# Altium PCB waffling60-MX.PcbDoc (part 1 of 2)
Units mm, origin at the board's own origin, x right, y up, seen from the top; angles counter-clockwise.
Board outline 284.81 x 94.3 mm, 2 copper layers (Component Side, Bottom Layer), stack 1.571 mm thick; 157 components, 101 nets, 791 pads, 59 vias.
Unrouted connection lines stored in the file: 52.
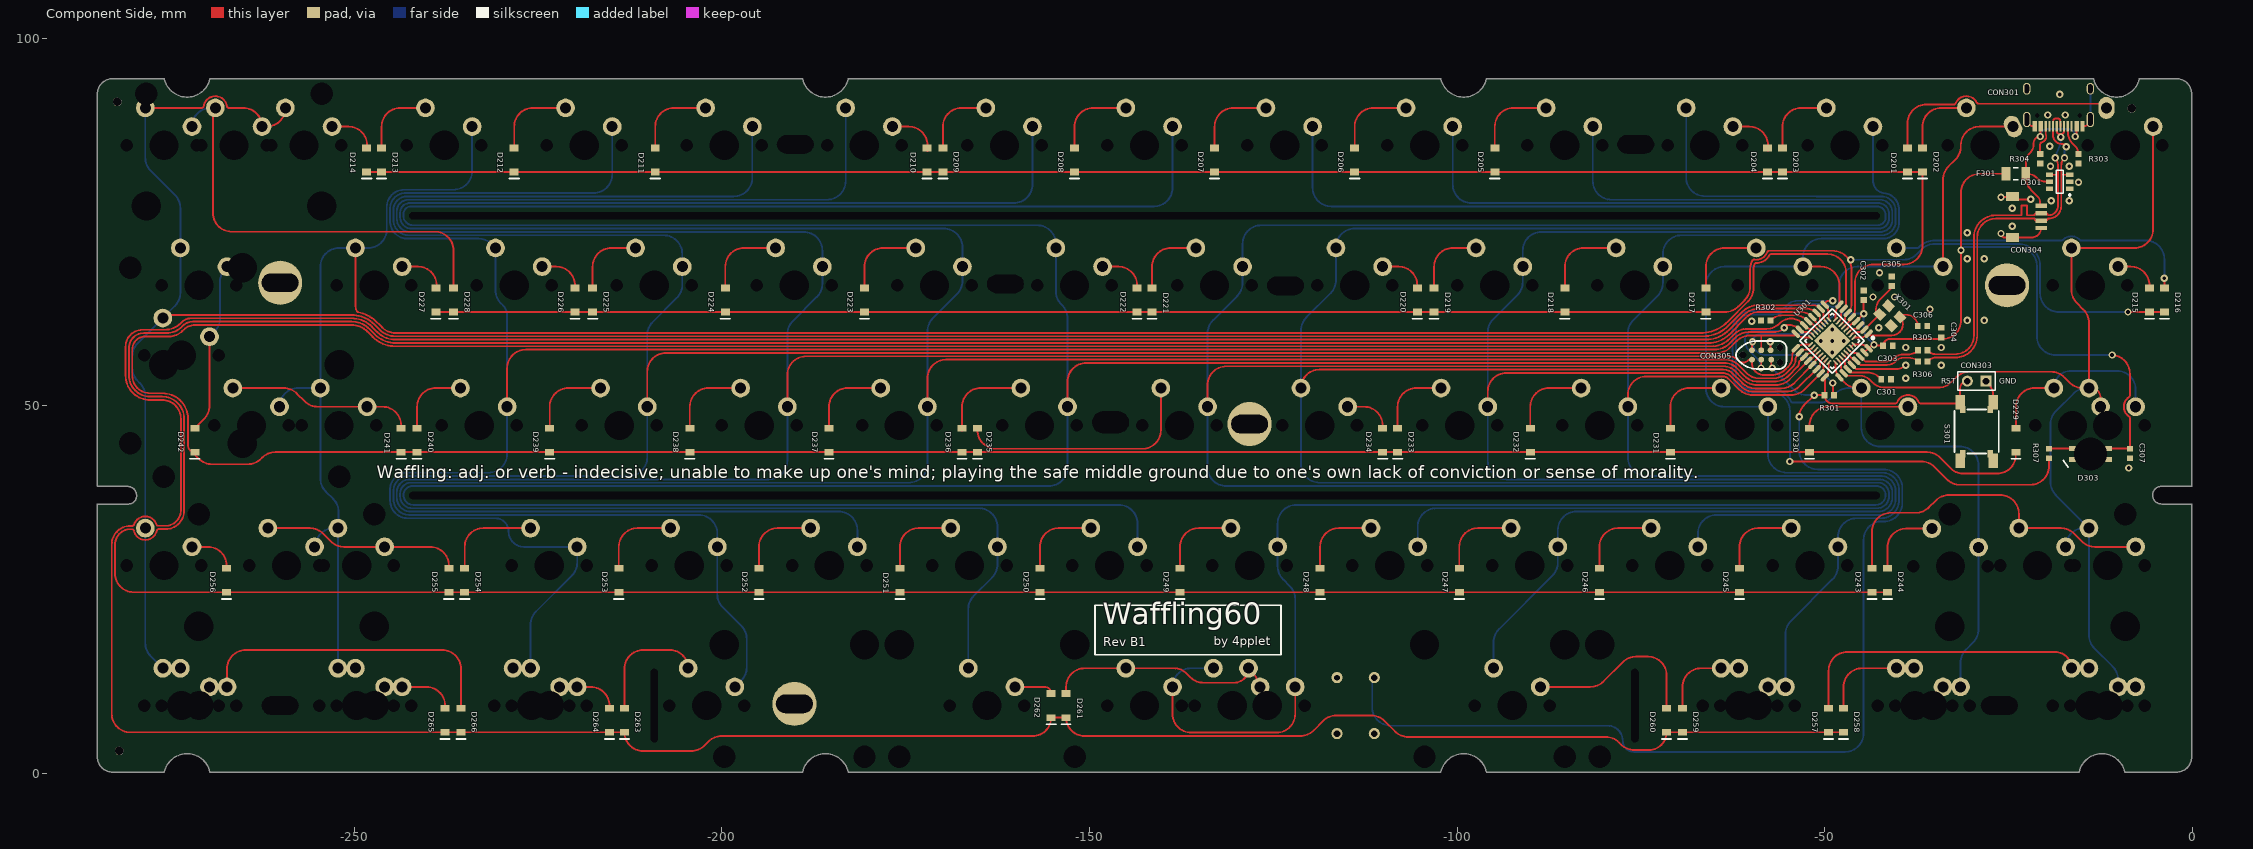
[diagram p0: Component Side view]
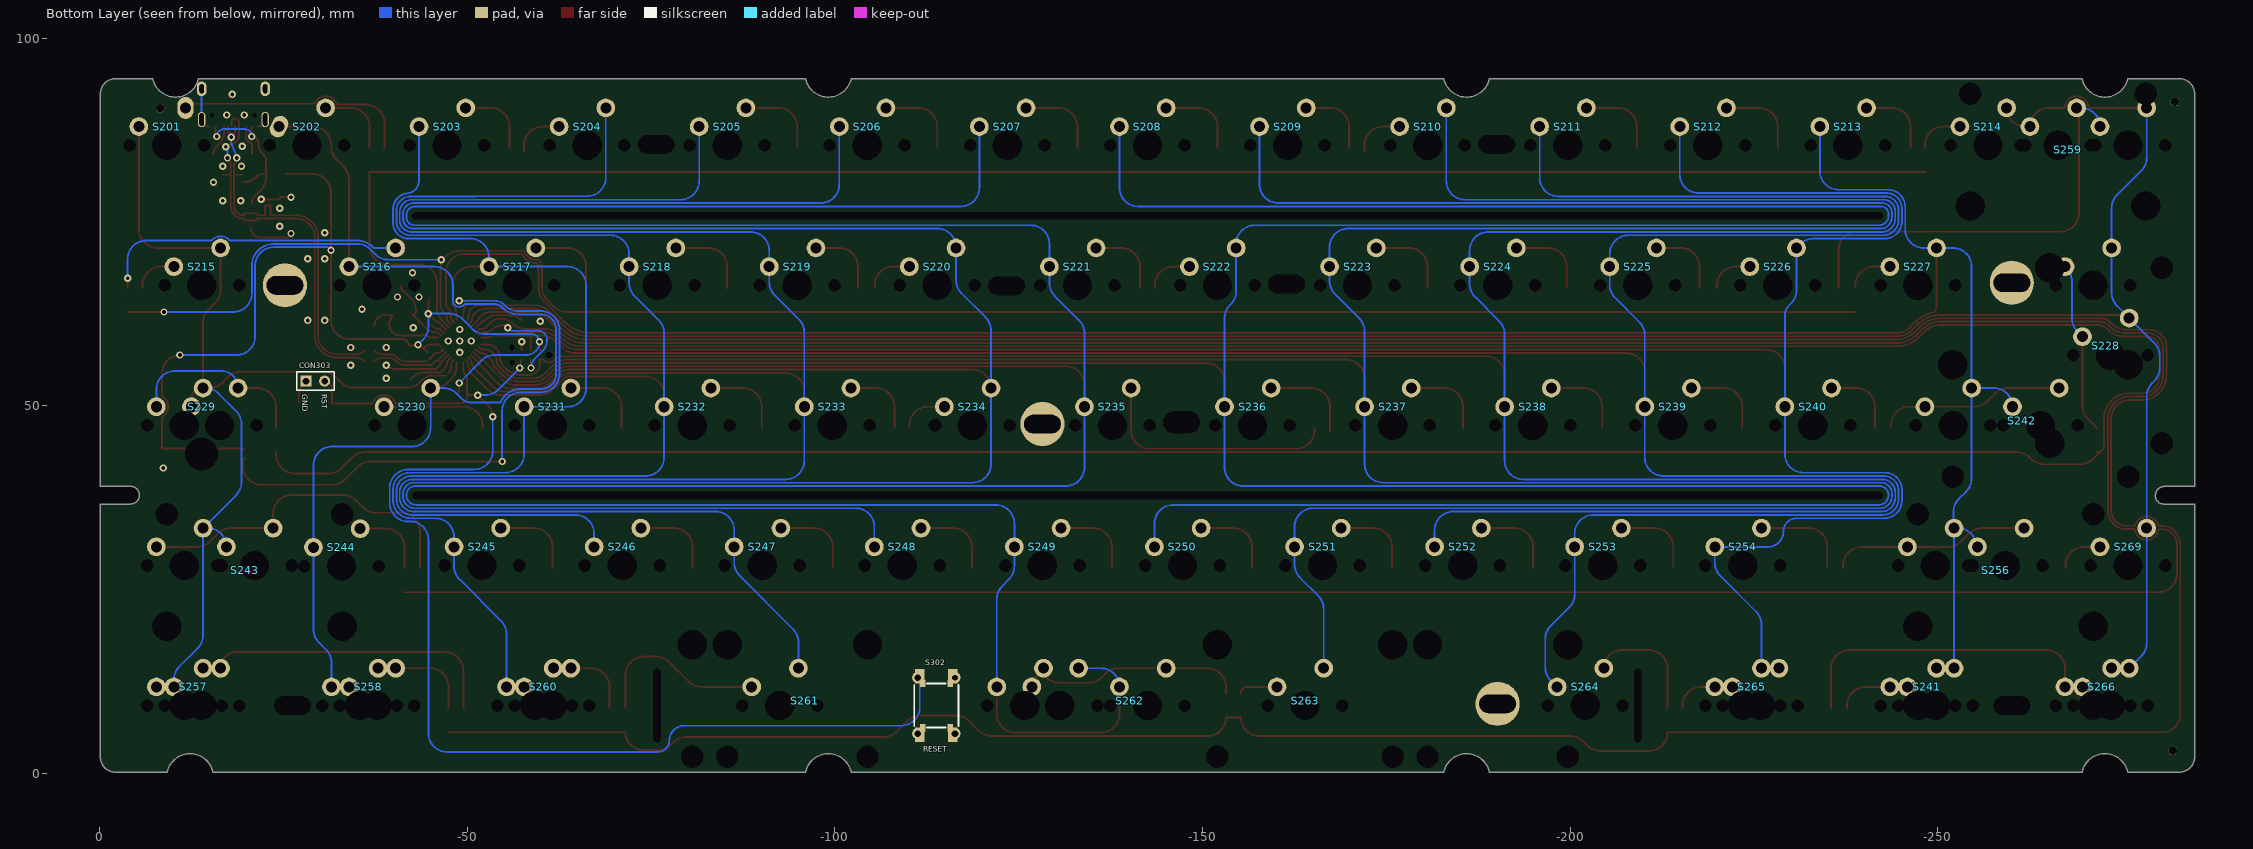
[diagram p1: Bottom Layer view, seen from below]
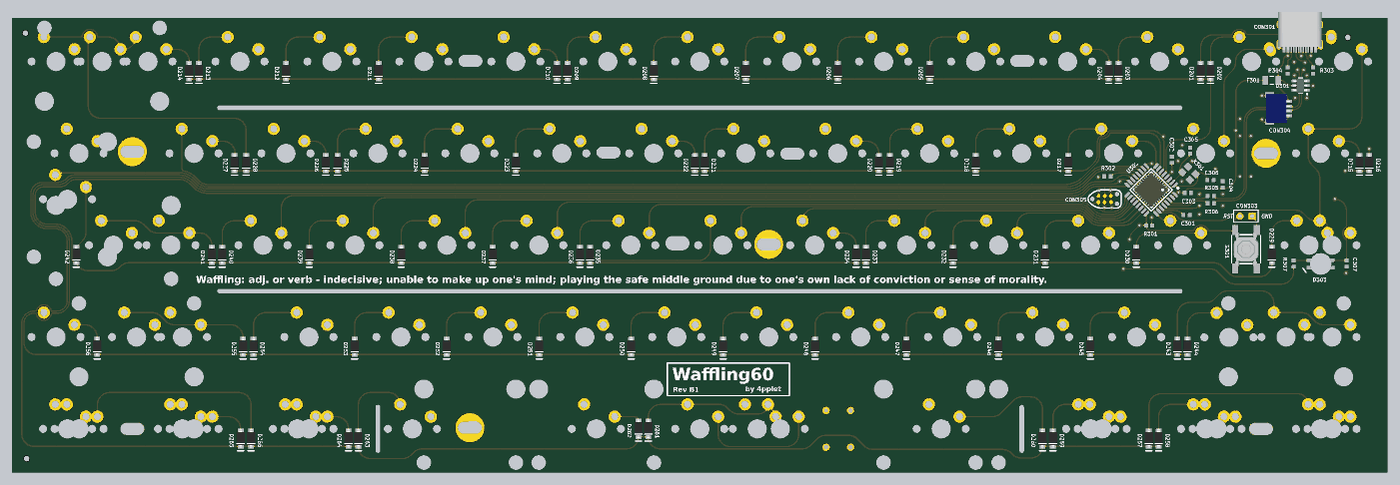
[diagram p3: 3D render of the assembled board from above, using the file's embedded part models]

## Layer stack, top to bottom
Top Solder: solder mask 0.0102, Solder Resist, Dk 3.5
Component Side: signal copper 0.0356
Dielectric 1: core 1.5, FR-4, Dk 4.2
Bottom Layer: signal copper 0.0356
Solder Side: solder mask 0.0102, Solder Resist, Dk 3.5

## Board outline
-282.85,0.165 ccw(c-282.85,0.215) -282.85,0.165 cw(c-282.85,2.215) -284.9,2.215 -284.9,36.545 cw(c-284.861,36.576) -284.861,36.626 -280.67,36.626 ccw(c-280.67,37.719) -279.577,37.719 -279.577,37.795 ccw(c-280.797,37.795) -280.797,39.015 -284.85,39.015 cw(c-284.85,39.065) -284.9,39.065 -284.9,92.415 cw(c-282.85,92.415) -282.85,94.465 cw(c-282.85,94.415) -282.85,94.465 -275.85,94.465 cw(c-275.85,94.415) -275.801,94.426 cw(c-272.7,95.149) -275.801,94.426 ccw(c-272.7,95.149) -269.599,94.426 cw(c-269.55,94.415) -269.55,94.465 -189.05,94.465 cw(c-189.05,94.415) -189.001,94.426 ccw(c-185.9,95.149) -182.799,94.426 cw(c-182.75,94.415) -182.75,94.465 -102.25,94.465 cw(c-102.25,94.415) -102.201,94.426 cw(c-99.1,95.149) -102.201,94.426 ccw(c-99.1,95.149) -95.999,94.426 cw(c-95.95,94.415) -95.95,94.465 -13.477,94.465 cw(c-13.477,94.415) -13.428,94.426 cw(c-10.327,95.149) -13.428,94.426 ccw(c-10.327,95.149) -7.226,94.426 cw(c-7.177,94.415) -7.164,94.464 cw(c-7.15,94.415) -7.15,94.465 -2.15,94.465 cw(c-2.15,92.415) -0.1,92.415 -0.1,39.065 cw(c-0.15,39.065) -0.15,39.015 -4.242,39.015 ccw(c-4.242,37.846) -5.411,37.846 ccw(c-4.191,37.846) -4.191,36.626 -0.15,36.626 cw(c-0.15,36.576) -0.1,36.576 -0.1,2.215 cw(c-2.15,2.215) -2.15,0.165 -9.15,0.165 ccw(c-9.15,0.215) -9.15,0.165 cw(c-9.15,0.215) -9.199,0.204 ccw(c-12.3,-0.52) -15.401,0.204 ccw(c-12.3,-0.52) -15.401,0.204 cw(c-15.45,0.215) -15.45,0.165 -95.95,0.165 cw(c-95.95,0.215) -95.999,0.204 ccw(c-99.1,-0.52) -102.201,0.204 ccw(c-99.1,-0.52) -102.201,0.204 cw(c-102.25,0.215) -102.25,0.165 -182.75,0.165 cw(c-182.75,0.215) -182.799,0.204 cw(c-185.9,-0.52) -182.799,0.204 ccw(c-185.9,-0.52) -189.001,0.204 cw(c-189.05,0.215) -189.05,0.165 -269.55,0.165 cw(c-269.55,0.215) -269.55,0.165 cw(c-269.55,0.215) -269.599,0.204 ccw(c-272.7,-0.52) -275.801,0.204 ccw(c-272.7,-0.52) -275.801,0.204 cw(c-275.85,0.215) -275.85,0.165

## Design rules (kind name [scope] priority, off if disabled: settings)
Clearance [All] p1: gap=0.2 ignorepadtopadclearanceinfootprint=FALSE except(0: Arc-Hole Track-Hole SMDPad-Hole THPad-Hole Via-Hole Fill-Hole Poly-Hole Region-Hole Text-Hole; 0.254: THPad-THPad THPad-Via THPad-Fill THPad-Poly THPad-Region THPad-Text Via-Via Via-Fill Via-Poly Via-Region Via-Text Fill-Fill Fill-Poly Fill-Region Fill-Text Poly-Poly Poly-Region Poly-Text Region-Region Region-Text Text-Text)
ComponentClearance [InComponent('No Component') And OnLayer('Component Side')] p1: gap=0.254 collisioncheckmode=3 verticalgap=0.254 showdistances=FALSE
DiffPairsRouting DiffPairsRouting_USB [InDifferentialPairClass('All Differential Pairs')] p1: maxlimit=0.254 minlimit=0.203 mostfreqgap=0.203 toplayer_minwidth=0.152 toplayer_maxwidth=0.381 toplayer_prefwidth=0.152 bottomlayer_minwidth=0.152 bottomlayer_maxwidth=0.381 bottomlayer_prefwidth=0.152 maxuncoupledlength=12.7
DiffPairsRouting [All] p2: maxlimit=0.254 minlimit=0.254 mostfreqgap=0.254 toplayer_minwidth=0.381 toplayer_maxwidth=0.381 toplayer_prefwidth=0.381 bottomlayer_minwidth=0.381 bottomlayer_maxwidth=0.381 bottomlayer_prefwidth=0.381 maxuncoupledlength=12.7
HoleSize [All] p1: absolutevalues=TRUE maxlimit=20 minlimit=0.025 maxpercent=80.000 minpercent=20.000
MatchedLengths MatchedLengths_USB_DiffPairs_1 [All] p1: tolerance=0.127 checknetsindiffpair=TRUE checkdiffpairvsdiffpair=FALSE checkxsignals=FALSE checkothers=FALSE
MatchedLengths MatchedLengths_USB_DiffPairs [All] p2: tolerance=0.127 checknetsindiffpair=TRUE checkdiffpairvsdiffpair=FALSE checkxsignals=FALSE checkothers=FALSE
PolygonConnect PolygonConnect_1 [All vs IsVia] p1: connectstyle=Direct reliefconductorwidth=0.254 reliefentries=4 polygonreliefangle="90 Angle" airgapwidth=0.254
PolygonConnect [All] p2: connectstyle=Relief reliefconductorwidth=0.254 reliefentries=4 polygonreliefangle="90 Angle" airgapwidth=0.254
RoutingVias [All] p1: holewidth=0.711 width=1.27 viastyle="Through Hole" minholewidth=0.711 minwidth=1.27 maxholewidth=0.711 maxwidth=1.27
SolderMaskExpansion [All] p1: expansion=0.102 istentingtop=FALSE
Width [All] p1: maxlimit=0.254 minlimit=0.203 preferedwidth=0.254
27 further rules are at their usual default settings.

## Classes and differential pairs
component class Designator: C201 C202 C203 C204 C205 C206 D201 D202 D203 D204 D205 D206 D207 D208 D209 D210 D211 D212 D213 D214 D215 D216 D217 D218 D219 D220 D221 D222 D223 D224 D225 D226 D227 D228 D229 D230 D231 D232 D233 D234 D235 D236 D237 D238 D239 D240 D241 D242 D243 D244 D245 D246 D247 D248 D249 D250 D251 D252 D253 D254 D255 D256 D257 D258 D259 D260 D261 D262 D263 D264 D265 D266 D268 S201 S202 S203 S204 S205 S206 S207 S208 S209 S210 S211 S212 S213 S214 S215 S216 S217 S218 S219 S220 S221 S222 S223 S224 S225 S226 S227 S228 S229 S230 S231 S232 S233 S234 S235 S236 S237 S238 S239 S240 S241 S242 S243 S244 S245 S246 S247 S248 S249 S250 S251 S252 S253 S254 S256 S257 S258 S259 S260 S261 S262 S263 S264 S265 S266 S269
differential pair D_PRE: +D_PRE_P -D_PRE_N
differential pair D: +D_P -D_N

## Components (designator, comment, footprint, x,y, rotation, side; value= is the part's Value field where it differs from the comment)
C301 "" C0603[1608] -41.656,53.594 r180 top value=1uF
C302 "" C0603[1608] -44.704,65.024 r270 top value=0.1uF
C303 "" C0603[1608] -41.402,58.166 r180 top value=0.1uF
C304 "" C0603[1608] -34.163,59.944 r270 top value=4,7uF
C305 "" C0603[1608] -40.894,66.914 r270 top value=36pF
C306 "" C0603[1608] -36.703,60.833 r180 top value=36pF
C307 "" C0603[1608] -8.5,43.5 r90 top value=0.1uF
CON301 "TYPE-C-31-M-12" TYPE-C-31-M-12 -18.2,88 r180 top locked
CON303 "Header 2" HDR1X2 -28.067,53.34 r180 top
CON304 "Header 5" "JST SM04B-SRSS-TB" -24.449,78.468 r270 top locked
CON305 "TC2030-IDC" TC2030-IDC-NL -58.627,56.896 r0 top locked
D201 "Diode" SOD-123 -38.735,83.415 r90 top
D202 "Diode" SOD-123 -36.703,83.415 r90 top
D203 "Diode" SOD-123 -55.753,83.415 r90 top
D204 "Diode" SOD-123 -57.785,83.415 r90 top
D205 "Diode" SOD-123 -94.869,83.415 r90 top
D206 "Diode" SOD-123 -113.919,83.415 r90 top
D207 "Diode" SOD-123 -132.969,83.415 r90 top
D208 "Diode" SOD-123 -152.019,83.415 r90 top
D209 "Diode" SOD-123 -169.926,83.415 r90 top
D210 "Diode" SOD-123 -172.085,83.415 r90 top
D211 "Diode" SOD-123 -209.042,83.415 r90 top
D212 "Diode" SOD-123 -228.219,83.415 r90 top
D213 "Diode" SOD-123 -246.253,83.415 r90 top
D214 "Diode" SOD-123 -248.285,83.415 r90 top
D215 "Diode" SOD-123 -5.842,64.365 r90 top
D216 "Diode" SOD-123 -3.81,64.365 r90 top
D217 "Diode" SOD-123 -66.167,64.365 r90 top
D218 "Diode" SOD-123 -85.344,64.365 r90 top
D219 "Diode" SOD-123 -103.124,64.365 r90 top
D220 "Diode" SOD-123 -105.41,64.365 r90 top
D221 "Diode" SOD-123 -141.478,64.365 r90 top
D222 "Diode" SOD-123 -143.51,64.365 r90 top
D223 "Diode" SOD-123 -180.594,64.365 r90 top
D224 "Diode" SOD-123 -199.517,64.365 r90 top
D225 "Diode" SOD-123 -217.551,64.365 r90 top
D226 "Diode" SOD-123 -219.964,64.365 r90 top
D227 "Diode" SOD-123 -238.887,64.365 r90 top
D228 "Diode" SOD-123 -236.474,64.365 r90 top
D229 "Diode" SOD-123 -24.003,45.315 r90 top
D230 "Diode" SOD-123 -52.07,45.315 r90 top
D231 "Diode" SOD-123 -70.993,45.315 r90 top
D232 "Diode" SOD-123 -90.043,45.315 r90 top
D233 "Diode" SOD-123 -108.077,45.315 r90 top
D234 "Diode" SOD-123 -110.109,45.315 r90 top
D235 "Diode" SOD-123 -165.227,45.315 r90 top
D236 "Diode" SOD-123 -167.32,45.315 r90 top
D237 "Diode" SOD-123 -185.42,45.315 r90 top
D238 "Diode" SOD-123 -204.343,45.315 r90 top
D239 "Diode" SOD-123 -223.393,45.315 r90 top
D240 "Diode" SOD-123 -241.427,45.315 r90 top
D241 "Diode" SOD-123 -243.586,45.315 r90 top
D242 "Diode" SOD-123 -271.653,45.315 r90 top
D243 "Diode" SOD-123 -43.561,26.265 r90 top
D244 "Diode" SOD-123 -41.468,26.265 r90 top
D245 "Diode" SOD-123 -61.595,26.265 r90 top
D246 "Diode" SOD-123 -80.645,26.265 r90 top
D247 "Diode" SOD-123 -99.695,26.265 r90 top
D248 "Diode" SOD-123 -118.618,26.265 r90 top
D249 "Diode" SOD-123 -137.668,26.265 r90 top
D250 "Diode" SOD-123 -156.718,26.265 r90 top
D251 "Diode" SOD-123 -175.768,26.265 r90 top
D252 "Diode" SOD-123 -194.945,26.265 r90 top
D253 "Diode" SOD-123 -213.995,26.265 r90 top
D254 "Diode" SOD-123 -234.95,26.265 r90 top
D255 "Diode" SOD-123 -237.109,26.265 r90 top
D256 "Diode" SOD-123 -267.335,26.265 r90 top
D257 "Diode" SOD-123 -49.469,7.215 r90 top
D258 "Diode" SOD-123 -47.437,7.215 r90 top
D259 "Diode" SOD-123 -69.342,7.215 r90 top
D260 "Diode" SOD-123 -71.501,7.215 r90 top
D261 "Diode" SOD-123 -153.162,9.215 r90 top
D262 "Diode" SOD-123 -155.194,9.215 r90 top
D263 "Diode" SOD-123 -213.233,7.215 r90 top
D264 "Diode" SOD-123 -215.265,7.215 r90 top
D265 "Diode" SOD-123 -237.617,7.215 r90 top
D266 "Diode" SOD-123 -235.458,7.215 r90 top
D301 "SRV05" SOT-23-6 -18.056,80.452 r180 top
D303 "SK6812MINI-E" SK6812MINI-E -13.857,43.422 r0 top
F301 "Fuse Thermal" C1206[3216] -24.003,81.534 r0 top
R301 "Res1" R0603[1608] -49.403,51.435 r180 top value=10K
R302 "Res1" R0603[1608] -58.039,61.595 r180 top value=10K
R303 "Res1" R0603[1608] -15.494,83.566 r270 top value=5k1
R304 "Res1" R0603[1608] -20.701,83.566 r270 top value=5k1
R305 "Res1" R0603[1608] -36.651,57.531 r0 top value=22
R306 "Res1" R0603[1608] -36.651,56.007 r0 top value=22
R307 "Res1" R0603[1608] -19.5,43.5 r270 top value=470
S201 "MX" "MX-SWITCH - SWITCHED POL"#1 -9.15,85.415 r180 bottom locked
S202 "MX" "MX-SWITCH - SWITCHED POL - CONNECTOR" -28.2,85.415 r180 bottom locked
S203 "MX" "MX-switch - switched pol" -47.25,85.415 r180 bottom locked
S204 "MX" MX-SWITCH -66.3,85.415 r180 bottom locked
S205 "MX" "MX-switch - switched pol" -85.35,85.415 r180 bottom locked
S206 "MX" "MX-switch - switched pol" -104.4,85.415 r180 bottom locked
S207 "MX" "MX-switch - switched pol" -123.45,85.415 r180 bottom locked
S208 "MX" "MX-switch - switched pol" -142.5,85.415 r180 bottom locked
S209 "MX" "MX-switch - switched pol" -161.55,85.415 r180 bottom locked
S210 "MX" MX-SWITCH -180.6,85.415 r180 bottom locked
S211 "MX" "MX-switch - switched pol" -199.65,85.415 r180 bottom locked
S212 "MX" "MX-switch - switched pol" -218.7,85.415 r180 bottom locked
S213 "MX" "MX-switch - switched pol" -237.75,85.415 r180 bottom locked
S214 "MX" MX-SWITCH -256.8,85.415 r180 bottom locked
S215 "MX" MX-switch -13.912,66.365 r180 bottom locked
S216 "MX" "MX-switch - switched pol" -37.725,66.365 r180 bottom
S217 "MX" "MX-switch - switched pol" -56.775,66.365 r180 bottom locked
S218 "MX" "MX-switch - switched pol" -75.825,66.365 r180 bottom locked
S219 "MX" "MX-switch - switched pol" -94.875,66.365 r180 bottom locked
S220 "MX" MX-switch -113.925,66.365 r180 bottom locked
S221 "MX" "MX-switch - switched pol" -132.975,66.365 r180 bottom locked
S222 "MX" MX-switch -152.025,66.365 r180 bottom locked
S223 "MX" "MX-switch - switched pol" -171.075,66.365 r180 bottom locked
S224 "MX" "MX-switch - switched pol" -190.125,66.365 r180 bottom locked
S225 "MX" "MX-switch - switched pol" -209.175,66.365 r180 bottom locked
S226 "MX" MX-switch -228.225,66.365 r180 bottom locked
S227 "MX" MX-switch -247.275,66.365 r180 bottom locked
S228 "MX" ? -271.087,66.365 r0 bottom
S229 "MX" "MX-SWITCH - CAPS" -16.294,47.315 r180 bottom locked
S230 "MX" MX-switch -42.487,47.315 r180 bottom locked
S231 "MX" "MX-switch - switched pol" -61.537,47.315 r180 bottom locked
S232 "MX" "MX-switch - switched pol" -80.587,47.315 r180 bottom locked
S233 "MX" "MX-switch - switched pol" -99.637,47.315 r180 bottom locked
S234 "MX" MX-switch -118.687,47.315 r180 bottom
S235 "MX" "MX-SWITCH - SWITCHED POL"#2 -137.737,47.315 r180 bottom locked
S236 "MX" "MX-SWITCH - SWITCHED POL"#2 -156.787,47.315 r180 bottom locked
S237 "MX" "MX-switch - switched pol" -175.837,47.315 r180 bottom locked
S238 "MX" "MX-switch - switched pol" -194.887,47.315 r180 bottom locked
S239 "MX" "MX-switch - switched pol" -213.937,47.315 r180 bottom locked
S240 "MX" "MX-switch - switched pol" -232.987,47.315 r180 bottom locked
S241 "MX" "MX-SWITCH - 1U MOD-R" -247.274,9.215 r180 bottom locked
S242 "MX" "MX-switch - Enter_ANSI_ISO_KEY" -263.95,47.315 r180 bottom locked
S243 "MX" "MX-SWITCH - LEFT SHIFT" -21.056,28.265 r180 bottom locked
S244 "MX" MX-switch -32.893,28.194 r180 bottom locked
S245 "MX" "MX-switch - switched pol" -52.012,28.265 r180 bottom locked
S246 "MX" "MX-switch - switched pol" -71.062,28.265 r180 bottom locked
S247 "MX" "MX-switch - switched pol" -90.112,28.265 r180 bottom locked
S248 "MX" "MX-switch - switched pol" -109.162,28.265 r180 bottom locked
S249 "MX" "MX-switch - switched pol" -128.212,28.265 r180 bottom locked
S250 "MX" "MX-switch - switched pol" -147.262,28.265 r180 bottom locked
S251 "MX" "MX-switch - switched pol" -166.312,28.265 r180 bottom locked
S252 "MX" "MX-switch - switched pol" -185.362,28.265 r180 bottom locked
S253 "MX" "MX-switch - switched pol" -204.412,28.265 r180 bottom locked
S254 "MX" "MX-switch - switched pol" -223.462,28.265 r180 bottom locked
S256 "MX" "MX-SWITCH - RIGHT SHIFT" -259.18,28.265 r180 bottom
S257 "MX" "MX-SWITCH - 1.5U MOD-L" -13.912,9.215 r180 bottom locked
S258 "MX" "MX-SWITCH - 1U MOD-L" -37.724,9.215 r180 bottom locked
S259 "MX" "MX-switch - backspace" -266.325,85.415 r180 bottom locked
S260 "MX" "MX-SWITCH - 1.5U MOD-L" -61.537,9.215 r180 bottom locked
S261 "MX" "MX-SWITCH - L SPLIT SPACE_V2" -102.018,9.215 r0 bottom locked
S262 "MX" "MX-SWITCH - SPACE_V3" -142.499,9.215 r180 bottom locked
S263 "MX" "MX-SWITCH - R SPLIT SPACE_V2" -163.931,9.215 r0 bottom locked
S264 "MX" "MX-switch - switched pol" -202.031,9.215 r180 bottom locked
S265 "MX" "MX-SWITCH - 1.5U MOD-R" -223.462,9.215 r180 bottom locked
S266 "MX" "MX-SWITCH - 1.5U MOD-R" -271.087,9.215 r180 bottom locked
S269 "MX" MX-SWITCH -275.85,28.265 r180 bottom locked
S301 "SW-PB" "COMBO SWITCH" -29.337,46.482 r270 top
S302 "SW-PB" "Combo switch - v2" -113.792,9.215 r270 bottom
U301 "ATMEGA32U2" ATMEGA32U2-COMBO -48.984,58.798 r225 top locked
X301 "XTAL" YSX321SL -41.148,62.23 r135 top

## Footprints (in the part's own frame and the unit in brackets; to place one, negate y for a bottom-side part, rotate by r counter-clockwise, add the part's x,y. Pads: shape width x height; smd on the part's side, far side on the other; paste and mask are expansions set on the pad)
ATMEGA32U2-COMBO [mm]
  oval 1.4x0.55 smd: 1(-4.2,2.8) 2(-4.2,2) 3(-4.2,1.2) 4(-4.2,0.4) 5(-4.2,-0.4) 6(-4.2,-1.2) 7(-4.2,-2) 8(-4.2,-2.8) 17(4.2,-2.8) 18(4.2,-2) 19(4.2,-1.2) 20(4.2,-0.4) 21(4.2,0.4) 22(4.2,1.2) 23(4.2,2) 24(4.2,2.8)
  oval 0.85x0.25 smd: 1(-2.4,1.75) 2(-2.4,1.25) 3(-2.4,0.75) 4(-2.4,0.25) 5(-2.4,-0.25) 6(-2.4,-0.75) 7(-2.4,-1.25) 8(-2.4,-1.75) 17(2.4,-1.75) 18(2.4,-1.25) 19(2.4,-0.75) 20(2.4,-0.25) 21(2.4,0.25) 22(2.4,0.75) 23(2.4,1.25) 24(2.4,1.75)
  oval 0.55x1.4 smd: 9(-2.8,-4.2) 10(-2,-4.2) 11(-1.2,-4.2) 12(-0.4,-4.2) 13(0.4,-4.2) 14(1.2,-4.2) 15(2,-4.2) 16(2.8,-4.2) 25(2.8,4.2) 26(2,4.2) 27(1.2,4.2) 28(0.4,4.2) 29(-0.4,4.2) 30(-1.2,4.2) 31(-2,4.2) 32(-2.8,4.2)
  oval 0.25x0.85 smd: 9(-1.75,-2.4) 10(-1.25,-2.4) 11(-0.75,-2.4) 12(-0.25,-2.4) 13(0.25,-2.4) 14(0.75,-2.4) 15(1.25,-2.4) 16(1.75,-2.4) 25(1.75,2.4) 26(1.25,2.4) 27(0.75,2.4) 28(0.25,2.4) 29(-0.25,2.4) 30(-0.75,2.4) 31(-1.25,2.4) 32(-1.75,2.4)
  rect 3.5x3.5 smd: 28(0,0)
  silkscreen extent -4.32,-3.1 3.1,3.75, body extent -2.51,-2.51 2.51,2.51, height 1
C0603[1608] [mm] "Chip Resistor, 2-Leads, Body 1,57x0,80mm, IPC Medium Density"
  rect 0.8x0.85 smd: 1(-0.65,0) 2(0.65,0)
  body extent -0.83,-0.43 0.82,0.43, height 0.5
C1206[3216] [mm]
  rect 1.2x1.8 smd: 1(-1.35,0) 2(1.35,0)
  silkscreen extent -0.35,-0.8 0.35,0.8, body extent -1.6,-0.9 1.6,0.9, height 1.2
"COMBO SWITCH" [mm] "Wurth Electronics Inc."
  rect 2x1.3 smd: 1(-3.975,2.25) 2(-3.975,-2.25) ""(3.975,2.25) ""(3.975,-2.25)
  rect 1x0.75 smd: 1(-3,1.875) 2(-3,-1.875) ""(3,1.875) ""(3,-1.875)
  round 1 on Mech15: ""(0,0)
  silkscreen extent -3,-3 3,3, body extent -3.25,-2.55 3.25,2.55, height 2
"Combo switch - v2" [mm] "THT: KSF0M311 LFTR"
  rect 2x1.3 smd: 1(-3.975,2.25) 2(-3.975,-2.25) ""(3.975,-2.25) ""(3.975,2.25)
  round 1.524 hole 0.762 mask+0.102: 1(-3.81,2.54)
  rect 1x0.75 smd: 1(-3,1.875) 2(-3,-1.875) ""(3,-1.875) ""(3,1.875)
  round 1.524 hole 0.9 mask+0.102: 2(-3.81,-2.54) ""(3.81,-2.54) ""(3.81,2.54)
  round 1 on Mech16: ""(0,0)
  silkscreen extent -3,-3 3,3, body extent -3.25,-2.55 3.25,2.55, height 2
HDR1X2 [mm] "Connector; Header; 2 Position"
  rect 1.5x1.5 hole 0.9: 1(0,0)
  round 1.5 hole 0.9: 2(2.54,0)
  silkscreen extent -1.27,-1.27 3.81,1.27
"JST SM04B-SRSS-TB" [mm]
  rect 0.6x1.55 smd: 1(1.3,3.875) 2(2.3,3.875) 3(3.3,3.875) 4(4.3,3.875)
  rect 1.2x1.8 smd: 5(0,0) 5(5.6,0)
  body extent -0.21,-0.76 5.79,4.19, height 3.25
MX-SWITCH [mm]
  round 2.54 hole 1.499 mask+0.102: 1(-3.81,2.54) 2(2.54,5.08)
  round 1 hole 1.702 unplated: ""(-5.08,0) ""(5.08,0)
  round 1 hole 3.988 unplated: ""(0,0)
MX-switch [mm]
  round 2.54 hole 1.499 mask+0.102: 1(-3.81,2.54) 2(2.54,5.08)
  round 1 hole 1.702 unplated: ""(-5.08,0) ""(5.08,0)
  round 1 hole 3.988 unplated: ""(0,0)
"MX-SWITCH - 1.5U MOD-L" [mm]
  round 2.54 hole 1.499 mask+0.102: 1(-6.191,2.54) 1(-3.81,2.54) 2(0.159,5.08) 2(2.54,5.08)
  round 1 hole 1.702 unplated: ""(-7.461,0) ""(-5.08,0) ""(2.699,0) ""(5.08,0)
  round 1 on Mech14: ""(-4.763,0) ""(-2.381,0) ""(0,0) ""(4.763,0)
  round 1 hole 3.988 unplated: ""(-2.381,0) ""(0,0)
"MX-SWITCH - 1.5U MOD-R" [mm]
  round 2.54 hole 1.499 mask+0.102: 1(-3.81,2.54) 1(-1.429,2.54) 2(2.54,5.08) 2(4.921,5.08)
  round 1 hole 1.702 unplated: ""(-5.08,0) ""(-2.699,0) ""(5.08,0) ""(7.461,0)
  round 1 on Mech14: ""(-2.381,0) ""(0,0) ""(2.381,0) ""(4.763,0)
  round 1 hole 3.988 unplated: ""(0,0) ""(2.381,0)
"MX-SWITCH - 1U MOD-L" [mm]
  round 2.54 hole 1.499 mask+0.102: 1(-6.191,2.54) 1(-3.81,2.54) 2(0.159,5.08) 2(2.54,5.08)
  round 1 hole 1.702 unplated: ""(-7.461,0) ""(-5.08,0) ""(2.699,0) ""(5.08,0)
  round 1 hole 3.988 unplated: ""(-2.381,0) ""(0,0)
  round 1 on Mech14: ""(-2.381,0) ""(0,0) ""(2.381,0)
"MX-SWITCH - 1U MOD-R" [mm]
  round 2.54 hole 1.499 mask+0.102: 1(-3.81,2.54) 1(-1.429,2.54) 2(2.54,5.08) 2(4.921,5.08)
  round 1 hole 1.702 unplated: ""(-5.08,0) ""(-2.699,0) ""(5.08,0) ""(7.461,0)
  round 1 on Mech14: ""(-4.763,0) ""(-2.381,0) ""(0,0) ""(2.381,0)
  round 1 hole 3.988 unplated: ""(0,0) ""(2.381,0)
"MX-switch - backspace" [mil]
  round 100 hole 59 mask+4: 1(100,200) 1(225,100) 2(-150,100) 2(475,200)
  round 60 hole 157.01 unplated: ""(-470,-325) ""(470,-325)
  round 60 hole 120 unplated: ""(-470,275) ""(470,275)
  round 39.37 hole 67.01 unplated: ""(-200,0) ""(175,0) ""(200,0) ""(575,0)
  round 39.37 hole 157.01 unplated: ""(0,0) ""(375,0)
  round 39.37 on Mech14: ""(0,0) ""(375,0)
"MX-SWITCH - CAPS" [mm]
  round 2.54 hole 1.499 mask+0.102: 1(-8.572,2.54) 1(2.54,5.08) 2(-3.81,2.54) 2(-2.222,5.08)
  round 1 hole 1.702 unplated: ""(-9.842,0) ""(5.08,0)
  round 1 hole 3.988 unplated: ""(-4.763,0) ""(0,0)
  round 1 on Mech14: ""(-4.763,0) ""(0,0)
"MX-switch - Enter_ANSI_ISO_KEY" [mm]
  round 2.54 hole 1.499 mask+0.102: 1(-15.716,2.54) 1(2.54,5.08) 2(-9.366,5.08) 2(-3.81,2.54)
  round 1 hole 1.702 unplated: ""(-16.986,0) ""(-6.826,0) ""(-5.08,0) ""(5.08,0)
  round 1.524 hole 3.048 unplated: ""(-11.938,-6.985) ""(11.938,-6.985)
  round 1.524 hole 3.988 unplated: ""(-11.938,8.255) ""(11.938,8.255)
  round 1 hole 3.988 unplated: ""(-11.906,0) ""(0,0)
  round 1 on Mech14: ""(-11.906,0) ""(-11.906,0) ""(0,0) ""(0,0)
"MX-SWITCH - L SPLIT SPACE_V2" [mil]
  round 100 hole 59 mask+4: 1(525,-100) 2(275,-200)
  round 60 hole 157.01 unplated: ""(-95,-325)
  round 60 hole 120 unplated: ""(-95,275)
  round 39.37 hole 67.01 unplated: ""(175,0) ""(575,0)
  round 39.37 hole 157.01 unplated: ""(375,0)
  round 39.37 on Mech14: ""(375,0)
"MX-SWITCH - LEFT SHIFT" [mil]
  round 100 hole 59 mask+4: 1(-525,100) 1(100,200) 2(-275,200) 2(-150,100)
  round 39.37 hole 67.01 unplated: ""(-575,0) ""(-200,0) ""(-175,0) ""(200,0)
  round 60 hole 157.01 unplated: ""(-470,-325) ""(470,-325)
  round 60 hole 120 unplated: ""(-470,275) ""(470,275)
  round 39.37 hole 157.01 unplated: ""(-375,0) ""(0,0)
  round 39.37 on Mech14: ""(-375,0) ""(0,0)
"MX-SWITCH - R SPLIT SPACE_V2" [mil]
  round 100 hole 59 mask+4: 1(150,-100) 2(-100,-200)
  round 60 hole 157.01 unplated: ""(-470,-325) ""(470,-325)
  round 60 hole 120 unplated: ""(-470,275) ""(470,275)
  round 39.37 hole 67.01 unplated: ""(-200,0) ""(200,0)
  round 39.37 hole 157.01 unplated: ""(0,0)
  round 39.37 on Mech14: ""(0,0)
"MX-SWITCH - RIGHT SHIFT" [mil]
  round 100 hole 59 mask+4: 1(-525,100) 1(100,200) 2(-275,200) 2(-150,100)
  round 39.37 hole 67.01 unplated: ""(-575,0) ""(-200,0) ""(-175,0) ""(200,0)
  round 60 hole 157.01 unplated: ""(-470,-325) ""(470,-325)
  round 60 hole 120 unplated: ""(-470,275) ""(470,275)
  round 39.37 hole 157.01 unplated: ""(-375,0) ""(0,0)
  round 39.37 on Mech14: ""(-375,0) ""(0,0)
"MX-SWITCH - SPACE_V3" [mil]
  round 100 hole 59 mask+4: 1(-806.55,100) 1(-368.75,200) 1(-150,100) 2(-618.75,100) 2(-556.55,200) 2(100,200)
  round 60 hole 120 unplated: ""(-2437.4,-275) ""(-2250,-275) ""(1499.61,-275) ""(2250,-275)
  round 60 hole 157.01 unplated: ""(-2437.4,325) ""(-2250,325) ""(1499.61,325) ""(2250,325)
  round 39.37 hole 67.01 unplated: ""(-856.55,0) ""(-268.75,0) ""(-200,0) ""(200,0)
  round 39.37 hole 157.01 unplated: ""(-656.55,0) ""(-468.75,0) ""(0,0)
  round 39.37 on Mech14: ""(-656.55,0) ""(-468.75,0) ""(0,0)
"MX-SWITCH - SWITCHED POL"#1 [mm]
  oval 2.2x3 hole 1.499 mask+0.102: 1(2.54,5.08)
  round 2.54 hole 1.499 mask+0.102: 2(-3.81,2.54)
  round 1 hole 1.702 unplated: ""(-5.08,0) ""(5.08,0)
  round 1 hole 3.988 unplated: ""(0,0)
"MX-SWITCH - SWITCHED POL"#2 [mm]
  round 2.54 hole 1.499 mask+0.102: 1(2.54,5.08) 2(-3.81,2.54)
  round 1 hole 1.702 unplated: ""(-5.08,0) ""(5.08,0)
  round 1 hole 3.988 unplated: ""(0,0)
"MX-switch - switched pol" [mm]
  round 2.54 hole 1.499 mask+0.102: 1(2.54,5.08) 2(-3.81,2.54)
  round 1 hole 1.702 unplated: ""(-5.08,0) ""(5.08,0)
  round 1 hole 3.988 unplated: ""(0,0)
"MX-SWITCH - SWITCHED POL - CONNECTOR" [mm]
  round 2.54 hole 1.499 mask+0.102: 1(2.54,5.08)
  oval 2.2x3 hole 1.499 rot 155 mask+0.102: 2(-3.81,2.54)
  round 1 hole 1.702 unplated: ""(-5.08,0) ""(5.08,0)
  round 1 hole 3.988 unplated: ""(0,0)
R0603[1608] [mm] "Chip Resistor, 2-Leads, Body 1,57x0,80mm, IPC Medium Density"
  rect 0.8x0.85 smd: 1(-0.65,0) 2(0.65,0)
  body extent -0.83,-0.43 0.82,0.43, height 0.5
SK6812MINI-E [mm]
  rect 1.2x0.7 smd: 1(2.3,0.75) 2(2.3,-0.75) 3(-2.3,-0.75) 4(-2.3,0.75)
  round 1 hole 4.5 unplated: ""(0,0)
  silkscreen extent -3.68,-1.78 -3.05,-0.89, body extent -2.79,-1.4 2.79,1.4, height 0.88
SOD-123 [mm]
  rect 0.91x1.22 smd: 1(1.635,0) 2(-1.635,0)
  silkscreen extent -2.54,-0.64 -2.54,0.63, body extent -1.87,-0.85 1.88,0.85, height 1.2
SOT-23-6 [mm]
  rect 1x0.55 smd: 1(-1.375,0.95) 2(-1.375,0) 3(-1.375,-0.95) 4(1.375,-0.95) 5(1.375,0) 6(1.375,0.95)
  silkscreen extent -1.5,-1.55 0.46,1.92, body extent -1.37,-1.44 1.47,1.49, height 1.05
TC2030-IDC-NL [mm] "Tag-Connect 6-Pin with No Legs (PN# TC2030-IDC-NL)"
  round 0.9 hole 0.995 unplated: 0(-2.54,0) 0(2.54,-1.016) 0(2.54,1.016)
  round 0.79 smd paste-0.39: 1(-1.27,-0.635) 2(-1.27,0.635) 3(0,-0.635) 4(0,0.635) 5(1.35,-0.635) 6(1.27,0.635)
  silkscreen extent -3.43,-1.91 3.43,1.9
TYPE-C-31-M-12 [mm]
  rect 0.6x1.45 smd: A1B12(-3.25,0) A4B9(-2.45,0) B1A12(3.25,0) B4A9(2.45,0)
  rect 0.3x1.45 smd: A5(-1.25,0) A6(-0.25,0) A7(0.25,0) A8(1.25,0) B5(1.75,0) B6(0.75,0) B7(-0.75,0) B8(-1.75,0)
  oval 1x2.1 hole 0.6 slot 1.7 at 90 deg: S1(-4.32,-0.915) S1(4.32,-0.915)
  oval 1x1.6 / inner oval 1x1.6 / far side oval 1.3x2 hole 0.6 slot 1.2 at 90 deg: S1(-4.32,-5.095) S1(4.32,-5.095)
  round 0 hole 0.65 unplated: ""(-2.89,-1.445) ""(2.89,-1.445)
  body extent -4.47,-7.72 4.47,0.18, height 3.21
YSX321SL [mm]
  rect 1.4x1.2 smd: 1(-1.1,-0.85) 2(1.1,-0.85) 3(1.1,0.85) 4(-1.1,0.85)
? [mm]
  round 2.54 hole 1.499 mask+0.102: 1(1.429,6.985) 1(3.81,-2.54) 2(-4.921,4.445) 2(-2.54,-5.08)
  round 1.524 hole 3.048 unplated: ""(-9.366,-2.413) ""(-9.366,21.463)
  round 1 hole 1.702 unplated: ""(-7.461,9.525) ""(-5.08,0) ""(2.699,9.525) ""(5.08,0)
  round 1 hole 3.988 unplated: ""(-2.381,9.525) ""(0,0)
  round 1 on Mech14: ""(-2.381,9.525) ""(-2.381,9.525) ""(0,0) ""(0,0)
  round 1.524 hole 3.988 unplated: ""(5.874,-2.413) ""(5.874,21.463)

## Part data
C301: library part Cap, "Capacitor", LCSC MFG="Samsung Electro-Mechanics", LCSC Part #=C15849, MFG=KEMET, MFGPN=C0603C104M5RACTU, MRF.Part=CL10A105KB8NNNC, Version="0603 imperial"
C302 C303 C307: library part Cap, "Capacitor", LCSC MFG=YAGEO, LCSC Part #=C14663, MFG=KEMET, MFGPN=C0603C104M5RACTU, MRF.Part=CC0603KRX7R9BB104, Version="0603 imperial"
C304: library part Cap, "Capacitor", LCSC MFG="Guangdong Fenghua Advanced Tech", LCSC Part #=C29823, MFG=KEMET, MFGPN=C0603C104M5RACTU, MRF.Part=1206B475K500NT, Version="1206 imperial"
C305 C306: library part Cap, "Capacitor", LCSC MFG="Samsung Electro-Mechanics", LCSC Part #=C159790, MFG=KEMET, MFGPN=C0603C104M5RACTU, MRF.Part=CL10C360JB8NNNC, Version="0603 imperial"
CON301: LCSC MFG="Korean Hroparts Elec", LCSC Part #=C165948, MFG="Korean Hroparts Elec", MFGPN=TYPE-C-31-M-12, MRF.Part=TYPE-C-31-M-12
CON303: "Header, 2-Pin"
CON304: "JST for USB daughter board", LCSC MFG="JST Sales America", LCSC Part #=C160404, MFG="JST Sales America Inc.", MFGPN=SM04B-SRSS-TB(LF)(SN), MRF.Part=SM04B-SRSS-TB(LF)(SN)
CON305: library part "Header 3X2", "TagConnect header"
D201 D202 D203 D204 D205 D206 D207 D208 D209 D210 D211 D212 D213 D214 D215 D216 D217 D218 D219 D220 D221 D222 D223 D224 D225 D226 D227 D228 D229 D230 D231 D232 D233 D234 D235 D236 D237 D238 D239 D240 D241 D242 D243 D244 D245 D246 D247 D248 D249 D250 D251 D252 D253 D254 D255 D256 D257 D258 D259 D260 D261 D262 D263 D264 D265 D266: "Default Diode", LCSC MFG="Brightking Elec (TAIWAN)", LCSC Part #=C109002, MFG="Bourns Inc.", MFGPN=CD0603-B0340R, MRF.Part=CD4148WTP, Version="0603 imperial"
F301: "Thermal Fuse", LCSC MFG="Shenzhen JDT Fuse", LCSC Part #=C135338, MFG="Bel Fuse Inc.", MFGPN=0ZCJ0050FF2G, MRF.Part=ASMD1206-050
R301 R302 R307: "Resistor", LCSC MFG="Uniroyal Elec", LCSC Part #=C25804, MFG="Panasonic Electronic Components", MFGPN=ERJ-3EKF5101V, MRF.Part=0603WAF1002T5E, Version="0603 imperial"
R303 R304: "Resistor", LCSC MFG="Uniroyal Elec", LCSC Part #=C23186, MFG="Panasonic Electronic Components", MFGPN=ERJ-3EKF5101V, MRF.Part=0603WAF5101T5E, Version="0603 imperial"
R305 R306: "Resistor", LCSC MFG="Uniroyal Elec", LCSC Part #=C23345, MFG="Panasonic Electronic Components", MFGPN=ERJ-3EKF5101V, MRF.Part=0603WAF220JT5E, Version="0603 imperial"
S201 S202 S203 S204 S205 S206 S207 S208 S209 S210 S211 S212 S213 S214 S216 S217 S218 S219 S220 S221 S222 S223 S224 S225 S226 S227 S228 S229 S230 S231 S232 S233 S234 S235 S236 S237 S238 S239 S240 S241 S242 S243 S244 S245 S246 S247 S248 S249 S250 S251 S252 S253 S254 S256 S257 S258 S259 S260 S261 S262 S263 S264 S265 S266 S269: library part SW-PB, "Switch"
S215: library part SW-PB, "TAB"
S301 S302: "Switch", LCSC MFG="XKB Enterprise", LCSC Part #=C318888, MFG=C&K, MFGPN="PTS645SM43SMTR92 LFS", MRF.Part=TS-1187A-C-D-B
U301: LCSC MFG="Microchip Tech", LCSC Part #=C57345, MFG="Microchip Technology", MFGPN=ATMEGA32U2-AUR, MRF.Part=ATMEGA32U2-MU
X301: "Crystal Oscillator", LCSC MFG="Yangxing Tech", LCSC Part #=C112572, MRF.Part=X503216MSB2GI

## Free pads (board coordinates)
  round 1.152 hole 1.152 unplated paste+0.148 mask+0.148: ""(-282.194,91.313) ""(-281.94,3.048) ""(-8.255,90.424)
  round 0 hole 2.5 slot 5 at 0 deg: ""(-260.05,9.215) ""(-26.25,9.215)
  round 6 hole 2.5 slot 5 at 0 deg: ""(-260.05,66.715) ""(-190.119,9.45) ""(-128.212,47.5) ""(-25.2,66.365)
  round 0 hole 1 slot 10 at 90 deg unplated: ""(-209.169,9.215) ""(-75.819,9.215)
  round 0 hole 2.5 slot 5 at 0 deg unplated: ""(-189.992,85.542) ""(-161.423,66.548) ""(-123.323,66.294) ""(-75.692,85.542)
  round 0 hole 3 slot 5 at 0 deg unplated: ""(-147.123,47.742)
  round 0 hole 1 slot 200 at 0 deg unplated mask+0.15: ""(-142.5,37.79) ""(-142.5,75.819)

## Via types
v1: diameter 1, hole 0.5, Component Side to Bottom Layer, tented both sides, 54 vias
v2: diameter 1, hole 0.5, Component Side to Bottom Layer, tented bottom, 5 vias

## Nets (pads, with @x,y where several pads share a name; then routed paths per layer and width w, separated by ;. In a path a pad name is that pad's centre, name@x,y a point inside that pad or via, vN(x,y) a via of type N, cw(c..) or ccw(c..) an arc to the next point about the centre after c; other vN are vias at no path point)
col1: S201.2 S215.2 S229.2 S243.2 S257.1 U301.26 | length 138.4
  Component Side w0.254: U301.26@-48.171,56.217 -48.076,56.122 cw(c-48.825,55.372) -47.765,55.372 -47.765,55.227 ccw(c-46.615,55.227) U301.26@-47.428,54.414 ; U301.26@-47.148,54.077 -45.287,54.077 cw(c-45.287,51.995) -43.816,53.468 ; -43.815,53.467 -43.543,53.195 ccw(c-41.747,54.991) -41.747,52.451 -34.58,52.451 ccw(c-34.58,54.991) -32.784,53.195 -32.113,53.866 cw(c-30.317,52.07) -30.317,54.61 -19.213,54.61 cw(c-19.213,52.07) -17.417,53.866 -16.69,53.139 ccw(c-14.894,54.935) -16.008,52.652 ccw(c-14.894,54.935) -14.894,52.395 S229.2@-14.071,52.395 S229.2@-14.071,52.579 ; S229.2@-12.484,49.855 -12.484,50.984 ccw(c-14.079,50.984) S229.2@-14.071,52.579 ; S201.2@-5.34,87.955 -5.34,73.985 cw(c-7.88,73.985) -7.88,71.445 S215.2@-16.452,71.445 -16.452,65.765 ccw(c-13.912,65.765) -15.709,63.969 -14.815,63.075 cw(c-16.611,61.279) -14.071,61.279 S229.2@-14.071,52.579
  Bottom Layer w0.254: S243.2@-17.246,30.805 cw(c-14.706,30.805) -14.706,33.345 S243.2@-14.071,33.345 ; S229.2@-14.071,52.395 -14.371,52.395 ccw(c-14.371,49.855) -16.167,51.651 -18.56,49.258 ccw(c-16.764,47.462) -19.304,47.462 -19.304,39.63 ccw(c-16.764,39.63) -18.56,37.834 S243.2@-14.071,33.345 ; S257.1@-10.102,11.755 -10.102,12.733 ccw(c-12.642,12.733) -10.846,14.529 -13.327,17.01 cw(c-11.531,18.806) -14.071,18.806 S243.2@-14.071,33.345
col2: S202.2 S216.2 S230.2 S244.1 S258.1 U301.25 | length 146.1
  Component Side w0.254: U301.25@-48.524,55.863 -48.524,55.128 ccw(c-46.714,55.128) U301.25@-47.994,53.848 -47.285,53.139 ccw(c-45.489,54.935) -45.489,52.395 S230.2@-45.027,52.395 ; S216.2@-33.915,68.905 -33.915,80.73 cw(c-31.375,80.73) -33.171,82.526 -32.24,83.457 ccw(c-34.036,85.253) -31.496,85.253 -31.496,85.415 cw(c-28.956,85.415) -28.956,87.955 S202.2@-24.39,87.955
  Bottom Layer w0.254: S216.2@-33.915,68.905 -45.528,68.905 ccw(c-45.528,66.365) -46.785,68.572 ccw(c-45.528,66.365) -48.068,66.365 -48.068,64.262 cw(c-48.895,64.262) -49.52,63.72 ccw(c-49.712,63.554) -49.713,63.808 -53.765,63.808 ccw(c-53.765,62.528) -54.671,63.432 -54.814,63.289 cw(c-56.932,65.405) -56.932,62.411 -59.998,62.411 ccw(c-59.998,60.325) -60.847,62.23 ccw(c-59.998,60.325) -62.084,60.325 -62.084,54.356 ccw(c-59.998,54.356) -61.507,52.916 ccw(c-59.998,54.356) -59.998,52.27 -57.277,52.27 cw(c-57.277,49.276) -55.617,51.768 cw(c-57.277,49.276) -54.574,50.564 ccw(c-54.345,50.673) -54.345,50.419 -52.451,50.419 -50.502,50.419 ccw(c-50.502,52.153) -49.276,50.927 -48.552,51.651 cw(c-46.756,49.855) -46.756,52.395 S230.2@-45.027,52.395 -45.027,46.99 ccw(c-42.487,46.99) -42.487,44.45 -31.623,44.45 cw(c-31.623,41.91) -29.083,41.91 S244.1@-29.083,30.734 -29.083,19.594 cw(c-31.623,19.594) -29.827,17.798 -30.789,16.836 ccw(c-28.993,15.04) -31.533,15.04 S258.1@-31.533,11.755
col3: S203.2 S217.2 S231.2 S245.2 S260.1 U301.8 | length 144.4
  Component Side w0.254: S217.2@-52.965,68.905 -50.534,68.905 cw(c-50.534,66.365) -47.994,66.365 U301.8@-47.994,63.747 ccw(c-46.714,62.467) -48.524,62.467 U301.8@-48.524,61.732
  Bottom Layer w0.254: S260.1@-55.346,11.755 -55.346,18.913 cw(c-52.806,18.913) -54.602,20.709 -48.946,26.365 ccw(c-50.742,28.161) -48.202,28.161 S245.2@-48.202,30.805 -48.202,32.153 cw(c-45.662,32.153) -45.662,34.693 -42.304,34.693 ccw(c-42.304,37.094) -41.617,34.793 ccw(c-42.304,37.094) -40.003,36.407 ccw(c-42.304,37.094) -39.903,37.094 -39.903,38.598 ccw(c-42.192,38.598) -39.967,39.137 ccw(c-42.192,38.598) -41.653,40.823 ccw(c-42.192,38.598) -42.192,40.887 -55.187,40.887 cw(c-55.187,43.427) -57.727,43.427 S231.2@-57.727,49.855 -63.627,49.855 cw(c-63.627,52.395) -66.019,51.541 cw(c-63.627,52.395) -66.167,52.395 -66.167,66.365 cw(c-63.627,66.365) -63.627,68.905 S217.2@-52.965,68.905 -52.965,70.182 cw(c-50.425,70.182) -50.425,72.722 -42.046,72.722 ccw(c-42.046,74.865) -41.687,72.752 ccw(c-42.046,74.865) -39.933,74.506 ccw(c-42.046,74.865) -39.903,74.865 -39.903,76.698 ccw(c-42.121,76.698) -39.949,77.148 ccw(c-42.121,76.698) -41.671,78.87 cw(c-41.671,80.639) -42.07,78.915 cw(c-41.671,80.639) -43.44,80.639 S203.2@-43.44,87.955
col4: S204.2 S218.2 S232.2 S246.2 U301.23 | length 210.4
  Component Side w0.254: S232.2@-76.777,49.855 -76.777,51.452 cw(c-74.237,51.452) -74.237,53.992 -63.979,53.992 cw(c-63.979,52.633) -63.019,53.595 ; -63.018,53.594 -61.62,52.196 ccw(c-59.824,53.992) -59.824,51.452 -54.553,51.452 ccw(c-54.553,53.992) -52.757,52.196 U301.23@-50.54,54.414 ccw(c-51.444,55.318) -50.165,55.318 -50.165,55.499 cw(c-49.32,55.499) -49.918,56.096 U301.23@-49.797,56.217
  Bottom Layer w0.254: S204.2@-68.84,90.495 -68.84,81.026 ccw(c-66.3,81.026) -66.3,78.486 -51.181,78.486 -51.157,78.462 -42.309,78.462 cw(c-42.309,76.51) -41.851,78.407 cw(c-42.309,76.51) -40.412,76.968 cw(c-42.309,76.51) -40.357,76.51 -40.357,75.053 cw(c-42.234,75.053) -40.393,74.689 cw(c-42.234,75.053) -41.87,73.212 cw(c-42.234,75.053) -42.234,73.176 -69.475,73.176 ccw(c-69.475,70.636) -72.015,70.636 S218.2@-72.015,68.905 -72.015,66.705 cw(c-74.555,66.705) -72.759,64.909 -76.034,61.634 ccw(c-74.237,59.838) -76.777,59.838 S232.2@-76.777,49.855 -76.777,42.973 ccw(c-74.237,42.973) -74.237,40.433 -42.38,40.433 cw(c-42.38,38.41) -41.829,40.356 cw(c-42.38,38.41) -40.434,38.961 cw(c-42.38,38.41) -40.357,38.41 -40.357,37.282 cw(c-42.492,37.282) -40.478,36.575 cw(c-42.492,37.282) -41.785,35.268 cw(c-42.492,37.282) -42.492,35.147 -64.712,35.147 ccw(c-64.712,32.607) -67.252,32.607 S246.2@-67.252,30.805
col5: S205.2 S219.2 S233.2 S247.2 S261.2 U301.22 | length 315.2
  Component Side w0.254: S233.2@-95.827,49.855 -95.827,51.906 cw(c-93.287,51.906) -93.287,54.446 -63.884,54.446 cw(c-63.884,52.811) -62.897,54.115 -61.432,52.65 ccw(c-59.636,54.446) -59.636,51.906 -55.231,51.906 ccw(c-55.231,54.446) -53.435,52.65 U301.22@-51.105,54.979 -50.737,55.347 ccw(c-51.016,55.626) -50.622,55.626 cw(c-49.48,55.626) -50.288,56.434 U301.22@-50.151,56.57
  Bottom Layer w0.254: S261.2@-95.033,14.295 -95.033,17.834 cw(c-92.493,17.834) -94.289,19.63 -87.046,26.873 ccw(c-88.842,28.669) -86.302,28.669 S247.2@-86.302,30.805 -86.302,33.061 cw(c-83.762,33.061) -83.762,35.601 -42.68,35.601 ccw(c-42.68,37.47) -41.941,35.753 ccw(c-42.68,37.47) -40.963,36.731 ccw(c-42.68,37.47) -40.811,37.47 -40.811,38.222 ccw(c-42.568,38.222) -40.906,38.792 ccw(c-42.568,38.222) -41.998,39.884 ccw(c-42.568,38.222) -42.568,39.979 -93.287,39.979 cw(c-93.287,42.519) -95.827,42.519 S233.2@-95.827,49.855 -95.827,59.965 cw(c-93.287,59.965) -95.084,61.761 -91.809,65.036 ccw(c-93.605,66.832) -91.065,66.832 S219.2@-91.065,68.905 -91.065,71.09 cw(c-88.525,71.09) -88.525,73.63 -42.422,73.63 ccw(c-42.422,75.241) -42.05,73.674 ccw(c-42.422,75.241) -40.855,74.869 ccw(c-42.422,75.241) -40.811,75.241 -40.811,76.322 ccw(c-42.497,76.322) -40.878,76.793 ccw(c-42.497,76.322) -42.026,77.941 ccw(c-42.497,76.322) -42.497,78.008 -79,78.008 cw(c-79,80.548) -81.54,80.548 S205.2@-81.54,87.955
col6: S206.2 S220.2 S234.2 S248.2 U301.21 | length 405.5
  Component Side w0.254: S234.2@-121.227,52.395 cw(c-118.723,52.395) -118.723,54.9 -63.805,54.9 cw(c-63.805,53.024) -62.613,54.473 -61.244,53.104 ccw(c-59.448,54.9) -59.448,52.36 -55.908,52.36 ccw(c-55.908,54.9) -54.112,53.104 U301.21@-51.671,55.545 cw(c-51.159,55.545) -51.521,55.907 U301.21@-50.504,56.924
  Bottom Layer w0.254: S248.2@-105.352,30.805 -105.352,33.515 cw(c-102.812,33.515) -102.812,36.055 -42.868,36.055 ccw(c-42.868,37.658) -42.067,36.27 ccw(c-42.868,37.658) -41.48,36.857 ccw(c-42.868,37.658) -41.265,37.658 -41.265,38.034 ccw(c-42.756,38.034) -41.392,38.635 ccw(c-42.756,38.034) -42.155,39.398 ccw(c-42.756,38.034) -42.756,39.525 -118.687,39.525 cw(c-118.687,42.065) -121.227,42.065 S234.2@-121.227,52.395 -121.227,60.219 cw(c-118.687,60.219) -120.484,62.015 -117.209,65.29 ccw(c-119.005,67.086) -116.465,67.086 S220.2@-116.465,71.445 -116.465,71.544 cw(c-113.925,71.544) -113.925,74.084 -42.61,74.084 ccw(c-42.61,75.429) -42.225,74.14 ccw(c-42.61,75.429) -41.321,75.044 ccw(c-42.61,75.429) -41.265,75.429 -41.265,76.134 ccw(c-42.685,76.134) -41.353,76.625 ccw(c-42.685,76.134) -42.194,77.466 ccw(c-42.685,76.134) -42.685,77.554 -98.05,77.554 cw(c-98.05,80.094) -100.59,80.094 S206.2@-100.59,87.955
col7: S207.2 S221.2 S235.2 S249.2 S262.1 U301.20 | length 536.7
  Component Side w0.254: -138.689,8.001 -138.689,8.074 ; S262.1@-138.689,11.755 -138.689,8.074 ; S235.2@-133.927,49.855 -133.927,52.814 cw(c-131.387,52.814) -131.387,55.354 -63.706,55.354 cw(c-63.706,53.261) -62.369,54.871 -61.056,53.558 ccw(c-59.26,55.354) -59.26,52.814 -56.586,52.814 ccw(c-56.586,55.354) -54.789,53.558 U301.20@-52.237,56.111 ccw(c-52.237,56.623) -51.875,56.261 U301.20@-50.858,57.277 ; S262.1@-133.443,14.295 S262.1@-133.443,14.605 ; S262.1@-122.013,11.755 -122.013,8.074 cw(c-124.553,8.074) -124.553,5.534 -136.149,5.534 cw(c-136.149,8.074) -138.689,8.074
  Bottom Layer w0.254: S262.1@-138.689,11.755 cw(c-136.149,11.755) -136.149,14.295 -133.443,14.295 S262.1@-133.443,14.351 ; S262.1@-122.013,11.755 -122.013,23.679 ccw(c-124.553,23.679) -122.757,25.475 -123.658,26.376 cw(c-121.862,28.172) -124.402,28.172 S249.2@-124.402,30.805 -124.402,33.969 cw(c-121.862,33.969) -121.862,36.509 -43.056,36.509 ccw(c-43.056,37.846) -41.719,37.846 ccw(c-42.944,37.846) -41.926,38.528 ccw(c-42.944,37.846) -42.262,38.864 ccw(c-42.944,37.846) -42.944,39.071 -131.387,39.071 cw(c-131.387,41.611) -133.927,41.611 S235.2@-133.927,49.855 -133.927,59.838 cw(c-131.387,59.838) -133.184,61.634 -129.909,64.909 ccw(c-131.705,66.705) -129.165,66.705 S221.2@-129.165,68.905 -129.165,71.998 cw(c-126.625,71.998) -126.625,74.538 -42.798,74.538 ccw(c-42.798,75.617) -42.389,74.619 ccw(c-42.798,75.617) -41.8,75.208 ccw(c-42.798,75.617) -41.719,75.617 -41.719,75.946 ccw(c-42.873,75.946) -41.851,76.481 ccw(c-42.873,75.946) -42.338,76.968 ccw(c-42.873,75.946) -42.873,77.1 -117.1,77.1 cw(c-117.1,79.64) -119.64,79.64 S207.2@-119.64,87.955
col8: S208.2 S222.2 S236.2 S250.2 U301.19 | length 543.9
  Component Side w0.254: S236.2@-152.977,49.855 -152.977,53.268 cw(c-150.437,53.268) -150.437,55.808 -63.618,55.808 cw(c-63.618,53.474) -62.118,55.262 -60.868,54.012 ccw(c-59.072,55.808) -59.072,53.268 -56.874,53.268 ccw(c-56.874,56.051) -54.908,54.082 ccw(c-56.874,56.051) -54.906,54.083 -53.711,55.279 ccw(c-54.185,55.753) -53.514,55.753 cw(c-53.003,55.753) -53.365,56.114 U301.19@-52.802,56.676 -52.602,56.877 cw(c-51.943,56.219) -51.943,57.15 ccw(c-51.943,57.755) -51.515,57.327 U301.19@-51.211,57.631
  Bottom Layer w0.254: S250.2@-143.452,30.805 -143.452,33.969 ccw(c-145.992,33.969) -145.992,36.509 -241.944,36.509 cw(c-241.944,37.846) -243.281,37.846 cw(c-242.056,37.846) -243.074,38.528 cw(c-242.056,37.846) -242.738,38.864 cw(c-242.056,37.846) -242.056,39.071 -155.517,39.071 ccw(c-155.517,41.611) -152.977,41.611 S236.2@-152.977,49.855 -152.977,61.882 ccw(c-155.517,61.882) -153.721,63.678 -153.821,63.778 cw(c-152.025,65.574) -154.565,65.574 S222.2@-154.565,71.445 -154.565,71.998 ccw(c-157.105,71.998) -157.105,74.538 -242,74.538 cw(c-242,75.819) -242.904,74.911 cw(c-242,75.819) -242.908,74.915 cw(c-242,75.819) -243.281,75.819 -243.281,76.073 cw(c-242.254,76.073) -243.226,76.405 cw(c-242.254,76.073) -242.586,77.045 cw(c-242.254,76.073) -242.254,77.1 -141.23,77.1 ccw(c-141.23,79.64) -138.69,79.64 S208.2@-138.69,87.955
col9: S209.2 S223.2 S237.2 S251.2 S263.2 U301.18 | length 514
  Component Side w0.254: S237.2@-172.027,49.855 -172.027,53.722 cw(c-169.487,53.722) -169.487,56.262 -63.528,56.262 cw(c-63.528,53.722) -61.863,55.64 ; -61.859,55.645 -60.68,54.466 ccw(c-58.884,56.262) -58.884,53.722 -57.062,53.722 ccw(c-57.062,56.505) -55.096,54.536 ccw(c-57.062,56.505) -55.095,54.537 -54.391,55.241 ccw(c-55.411,56.261) -53.968,56.261 cw(c-53.048,56.261) -53.699,56.911 U301.18@-53.368,57.242 cw(c-52.364,56.238) -52.364,57.658 -52.197,57.658 ccw(c-52.197,58.396) -51.675,57.874 U301.18@-51.565,57.985
  Bottom Layer w0.254: S263.2@-166.471,14.295 -166.471,22.342 cw(c-163.931,22.342) -165.727,24.138 -163.246,26.619 ccw(c-165.042,28.415) -162.502,28.415 S251.2@-162.502,30.805 -162.502,33.515 ccw(c-165.042,33.515) -165.042,36.055 -242.132,36.055 cw(c-242.132,37.658) -242.933,36.27 cw(c-242.132,37.658) -243.52,36.857 cw(c-242.132,37.658) -243.735,37.658 -243.735,38.034 cw(c-242.244,38.034) -243.608,38.635 cw(c-242.244,38.034) -242.845,39.398 cw(c-242.244,38.034) -242.244,39.525 -174.567,39.525 ccw(c-174.567,42.065) -172.027,42.065 S237.2@-172.027,49.855 -172.027,60.092 cw(c-169.487,60.092) -171.284,61.888 -168.009,65.163 ccw(c-169.805,66.959) -167.265,66.959 S223.2@-167.265,68.905 -167.265,71.544 ccw(c-169.805,71.544) -169.805,74.084 -242.188,74.084 cw(c-242.188,75.631) -242.884,74.249 cw(c-242.188,75.631) -243.57,74.935 cw(c-242.188,75.631) -243.735,75.631 -243.735,76.261 cw(c-242.442,76.261) -243.696,76.577 cw(c-242.442,76.261) -242.758,77.515 cw(c-242.442,76.261) -242.442,77.554 -160.28,77.554 ccw(c-160.28,80.094) -157.74,80.094 S209.2@-157.74,87.955
col10: CON305.1 S210.2 S224.2 S238.2 S252.2 U301.17 | length 438.4
  Component Side w0.254: S238.2@-191.077,49.855 -191.077,54.176 cw(c-188.537,54.176) -188.537,56.716 -62.983,56.716 cw(c-62.983,55.124) -61.857,56.25 -61.786,56.179 ccw(c-61.065,56.9) -61.609,56.037 ccw(c-61.065,56.9) -61.065,55.88 ccw(c-61.065,56.747) -60.452,56.134 cw(c-60.145,55.827) -60.145,56.261 CON305.1@-59.897,56.261 -59.897,55.78 ccw(c-58.293,55.78) -58.293,54.176 -57.25,54.176 ccw(c-57.25,56.959) -55.284,54.99 ccw(c-57.25,56.959) -55.283,54.991 -54.972,55.302 ccw(c-56.299,56.629) -54.422,56.629 cw(c-52.755,56.629) U301.17@-53.934,57.808 cw(c-52.653,56.527) -52.653,58.338 U301.17@-51.918,58.338 ; S210.2@-183.642,89.993 S210.2@-183.14,90.495
  Bottom Layer w0.254: S210.2@-183.14,90.495 -183.14,80.548 cw(c-185.68,80.548) -185.68,78.008 -242.63,78.008 ccw(c-242.63,76.449) -242.937,77.977 ccw(c-242.63,76.449) -244.158,76.756 ccw(c-242.63,76.449) -244.189,76.449 -244.189,75.443 ccw(c-242.376,75.443) -244.068,74.791 ccw(c-242.376,75.443) -243.028,73.751 ccw(c-242.376,75.443) -242.376,73.63 -188.855,73.63 cw(c-188.855,71.09) -186.315,71.09 S224.2@-186.315,68.905 -186.315,66.578 cw(c-188.855,66.578) -187.059,64.782 -190.334,61.507 ccw(c-188.537,59.711) -191.077,59.711 S238.2@-191.077,49.855 -191.077,42.519 cw(c-193.617,42.519) -193.617,39.979 -242.432,39.979 ccw(c-242.432,38.222) -243.002,39.884 ccw(c-242.432,38.222) -244.094,38.792 ccw(c-242.432,38.222) -244.189,38.222 -244.189,37.47 ccw(c-242.32,37.47) -244.037,36.731 ccw(c-242.32,37.47) -243.059,35.753 ccw(c-242.32,37.47) -242.32,35.601 -184.092,35.601 cw(c-184.092,33.061) -181.552,33.061 S252.2@-181.552,30.805
col11: CON305.4 S211.2 S225.2 S239.2 S253.2 S264.2 U301.16 | length 406.3
  Component Side w0.254: S239.2@-210.127,49.855 -210.127,54.63 cw(c-207.587,54.63) -207.587,57.17 -64.638,57.17 ccw(c-64.638,59.71) -62.842,57.914 -61.955,58.801 cw(c-60.161,57.007) -60.161,59.544 -58.674,59.544 ; CON305.4@-58.627,57.531 -58.627,59.497 -58.674,59.544 ; U301.16@-51.918,59.257 -52.653,59.257 cw(c-52.653,61.068) U301.16@-53.934,59.788 cw(c-54.177,59.788) -54.177,59.544 -58.674,59.544
  Bottom Layer w0.254: S264.2@-198.221,11.755 -197.34,12.636 ccw(c-199.136,14.432) -196.596,14.432 -196.596,18.252 ccw(c-199.136,18.252) -197.34,20.048 -199.858,22.566 cw(c-198.062,24.362) -200.602,24.362 S253.2@-200.602,30.805 -200.602,32.607 ccw(c-203.142,32.607) -203.142,35.147 -242.508,35.147 cw(c-242.508,37.282) -243.215,35.268 cw(c-242.508,37.282) -244.522,36.575 cw(c-242.508,37.282) -244.643,37.282 -244.643,38.41 cw(c-242.62,38.41) -244.566,38.961 cw(c-242.62,38.41) -243.171,40.356 cw(c-242.62,38.41) -242.62,40.433 -212.667,40.433 ccw(c-212.667,42.973) -210.127,42.973 S239.2@-210.127,49.855 -210.127,59.584 cw(c-207.587,59.584) -209.384,61.38 -206.109,64.655 ccw(c-207.905,66.451) -205.365,66.451 S225.2@-205.365,68.905 -205.365,70.636 ccw(c-207.905,70.636) -207.905,73.176 -242.564,73.176 cw(c-242.564,75.255) -243.192,73.273 cw(c-242.564,75.255) -244.546,74.627 cw(c-242.564,75.255) -244.643,75.255 -244.643,76.637 cw(c-242.818,76.637) -244.618,76.939 cw(c-242.818,76.637) -243.12,78.437 cw(c-242.818,76.637) -242.818,78.462 -198.38,78.462 ccw(c-198.38,81.002) -195.84,81.002 S211.2@-195.84,87.955